# Altium PCB ADXL278.PcbDoc
Units mm, origin at the board's own origin, x right, y up, seen from the top; angles counter-clockwise.
Board outline 20 x 22.95 mm, 2 copper layers (Top Layer, Bottom Layer); 5 components, 5 nets, 23 pads, 5 vias.
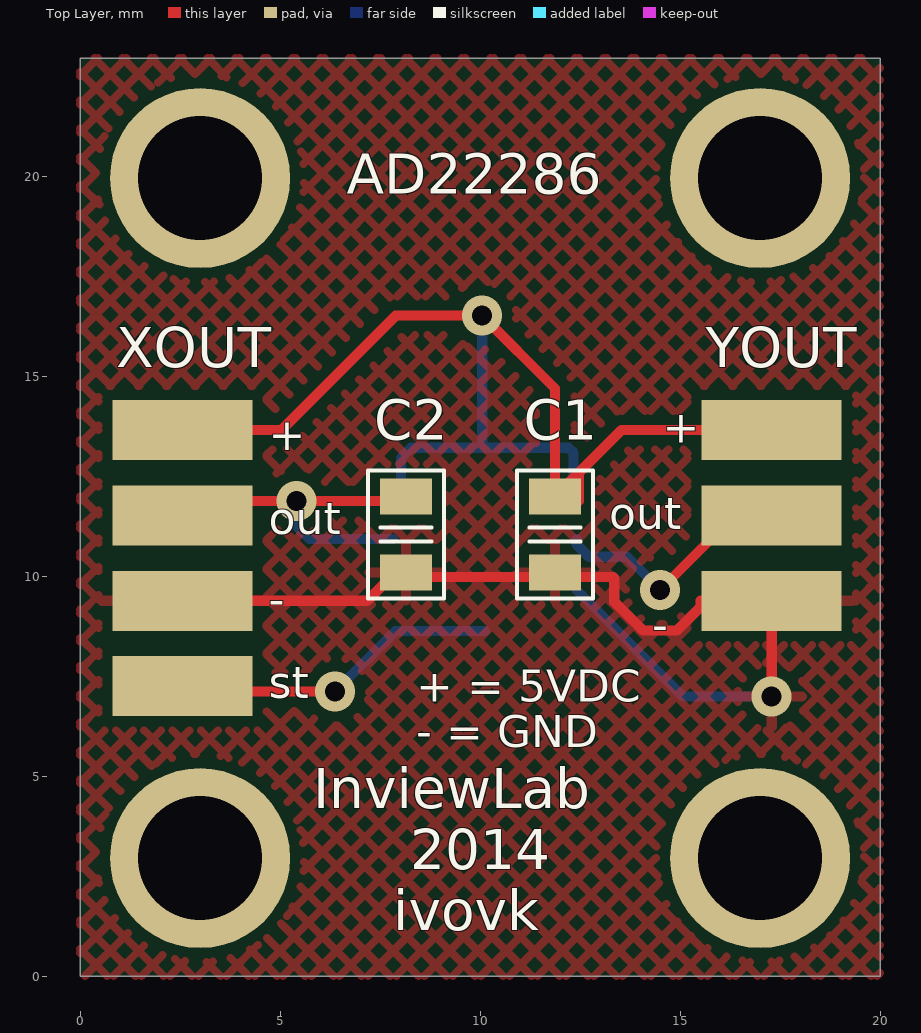
[diagram p0: Top Layer view]
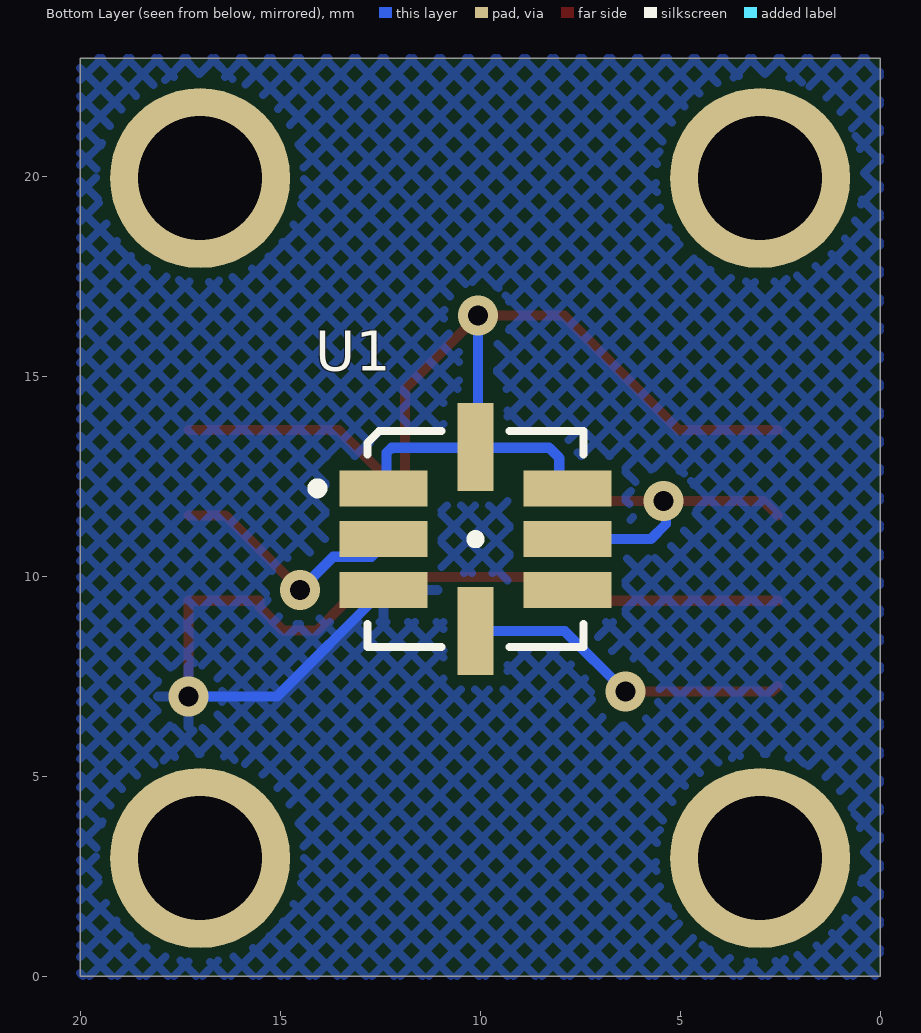
[diagram p1: Bottom Layer view, seen from below]

## Layer stack, top to bottom
Top Solder: solder mask 0.0102, Solder Resist, Dk 3.5
Top Layer: signal copper 0.0356
Dielectric 1: dielectric 0.32, FR-4, Dk 4.8
Bottom Layer: signal copper 0.0356
Bottom Solder: solder mask 0.0102, Solder Resist, Dk 3.5

## Board outline
0,0 0,22.949 20,22.949 20,0

## Design rules (kind name [scope] priority, off if disabled: settings)
Clearance [All] p1: gap=0.254
PolygonConnect [All] p1: connectstyle=Relief reliefconductorwidth=0.254 reliefentries=4 polygonreliefangle="90 Angle" airgapwidth=0.254
RoutingVias [All] p1: holewidth=0.5 width=1 viastyle="Through Hole" minholewidth=0.5 minwidth=1 maxholewidth=0.5 maxwidth=1
SolderMaskExpansion [All] p1: expansion=0.102
UnpouredPolygon [All] p1: allowunpoured=FALSE
Width [All] p1: maxlimit=0.254 minlimit=0.15 preferedwidth=0.2
29 further rules are at their usual default settings.

## Components (designator, comment, footprint, x,y, rotation, side; value= is the part's Value field where it differs from the comment)
C1 "0.1uF(AD22284-DNP)" C_0805 11.874,11.041 r90 top
C2 "1nF" C_0805 8.147,11.041 r90 top
U1 "ADXL278" E-8-1 10.116,10.922 r180 bottom
XOUT "X_OUT" 4_pin_plate_conn 2.559,11.049 r0 top (schematic designator CONN2)
YOUT "Y_OUT(AD22284-DNP)" 3_pin_plate_conn 17.291,11.049 r0 top (schematic designator CONN1)

## Footprints (in the part's own frame and the unit in brackets; to place one, negate y for a bottom-side part, rotate by r counter-clockwise, add the part's x,y. Pads: shape width x height; smd on the part's side, far side on the other; paste and mask are expansions set on the pad)
3_pin_plate_conn [mm]
  rect 3.5x1.5 smd: 1(0,2.6) 2(0,0.467) 3(0,-1.667)
4_pin_plate_conn [mm]
  rect 3.5x1.5 smd: 1(0,2.6) 2(0,0.467) 3(0,-1.667) 4(0,-3.8)
C_0805 [mm] "Capacitor Pattern"
  rect 0.9x1.3 smd: 1(-0.95,0) 2(0.95,0)
  silkscreen extent -1.6,-0.95 1.6,0.95, body extent -1,-0.63 1,0.62, height 0.6
E-8-1 [mm] "LCC, 8-Pins, Body 5,03x5,03mmx2,16mm, Pitch 1,27mm, IPC Low Density"
  rect 2.2x0.9 smd: 1(-2.3,1.27) 2(-2.3,0) 3(-2.3,-1.27) 5(2.3,-1.27) 6(2.3,0) 7(2.3,1.27)
  rect 0.9x2.2 smd: 4(0,-2.3) 8(0,2.3)
  silkscreen extent -4.08,-2.7 2.7,2.7, body extent -2.5,-2.51 2.5,2.49, height 1.93

## Part data
C1 C2: library part C0805, "Capacitor"
U1: "Analog devices accelerometer"
XOUT: library part 4_pin_plate_conn
YOUT: library part 3_pin_plate_conn

## Free pads (board coordinates)
  round 4.5 hole 3.1: 1(3,2.949) 1(3,19.949) 1(17,2.949) 1(17,19.949)

## Via types
v1: diameter 1, hole 0.5, Top Layer to Bottom Layer, 5 vias

## Nets (pads, with @x,y where several pads share a name; then routed paths per layer and width w, separated by ;. In a path a pad name is that pad's centre, name@x,y a point inside that pad or via, vN(x,y) a via of type N, cw(c..) or ccw(c..) an arc to the next point about the centre after c; other vN are vias at no path point)
GND: C1.1 C2.1 U1.3 XOUT.3 YOUT.3 | length 24.7
  Top Layer w0.254: XOUT.3 7.177,9.382 7.766,9.972 12.465,9.972 13.332,9.972 13.354,9.95 13.354,9.358 14.077,8.636 14.918,8.636 15.513,9.231 15.513,9.382 YOUT.3 v1(17.291,6.985)
  Bottom Layer w0.254: U1.3 15.083,6.985 v1(17.291,6.985)
NetCONN1_2: U1.2 YOUT.2 | length 6.3
  Top Layer w0.254: v1(14.497,9.652) 16.361,11.516 YOUT.2
  Bottom Layer w0.254: U1.2 12.416,10.786 12.719,10.483 13.674,10.483 14.497,9.659 v1(14.497,9.652)
SELF_TEST: U1.4 XOUT.4 | length 8.2
  Top Layer w0.254: XOUT.4 2.696,7.112 v1(6.369,7.112)
  Bottom Layer w0.254: v1(6.369,7.112) 7.879,8.622 U1.4
VCC_5V: C1.2 U1.1 U1.7 U1.8 XOUT.1 YOUT.1 | length 30.3
  Top Layer w0.254: XOUT.1 5.032,13.649 7.893,16.51 v1(10.052,16.51) 11.874,14.688 C1.2 12.465,12.582 ; C1.2@12.465,11.872 12.465,12.582 ; YOUT.1 14.242,13.649 13.532,13.649 12.465,12.582
  Bottom Layer w0.254: U1.7 8.02,12.396 8.02,12.954 8.274,13.208 U1.8@9.975,13.208 ; v1(10.052,16.51) 10.052,13.286 U1.8@9.975,13.208 ; U1.1 12.338,12.27 12.338,13.081 12.211,13.208 U1.8@9.975,13.208
X_OUT: C2.2 U1.6 XOUT.2 | length 8.6
  Top Layer w0.254: XOUT.2 2.916,11.872 v1(5.414,11.872) C2.2@7.766,11.872
  Bottom Layer w0.254: v1(5.414,11.872) 5.353,11.811 5.353,11.303 5.734,10.922 U1.6
pads on no net: U1.5

## Polygon pours and split planes (outlines as drawn)
GND on Top Layer "GND" (hatched 45Degree grid 0.5 track 0.2, pour order 2): 0,22.949 20,22.949 20,0 0,0
GND on Bottom Layer "GND" (hatched 45Degree grid 0.5 track 0.2, remove dead copper, pour order 4): 0,22.949 20,22.949 20,0 0,0

## Silkscreen, mask and mechanical layers (free items; w line width, h text height)
Top Overlay:
  text "AD22286" at 6.668,19.558 h1
  text "+" at 14.56,13.335 h0.8
  text "+" at 4.718,13.141 h0.8
  text "out" at 13.227,11.176 h0.8
  text "out" at 4.718,11.049 h0.8
  text "-" at 4.718,9.017 h0.8
  text "-" at 14.306,8.382 h0.8
  text "st" at 4.718,6.941 h0.8
  text "+ = 5VDC" at 8.401,6.858 h0.8
  text "- = GND" at 8.401,5.715 h0.8
  text "InviewLab" at 5.835,4.191 h1
  text "2014" at 8.251,2.667 h1
  text "ivovk" at 7.834,1.143 h1
Mechanical 13:
  the board outline again, w0.254